# Altium PCB BancoPruebas.PcbDoc
Units mm, origin at the board's own origin, x right, y up, seen from the top; angles counter-clockwise.
Board outline 100 x 50 mm, 2 copper layers (Top Layer, Bottom Layer); 24 components, 12 nets, 44 pads, 0 vias.
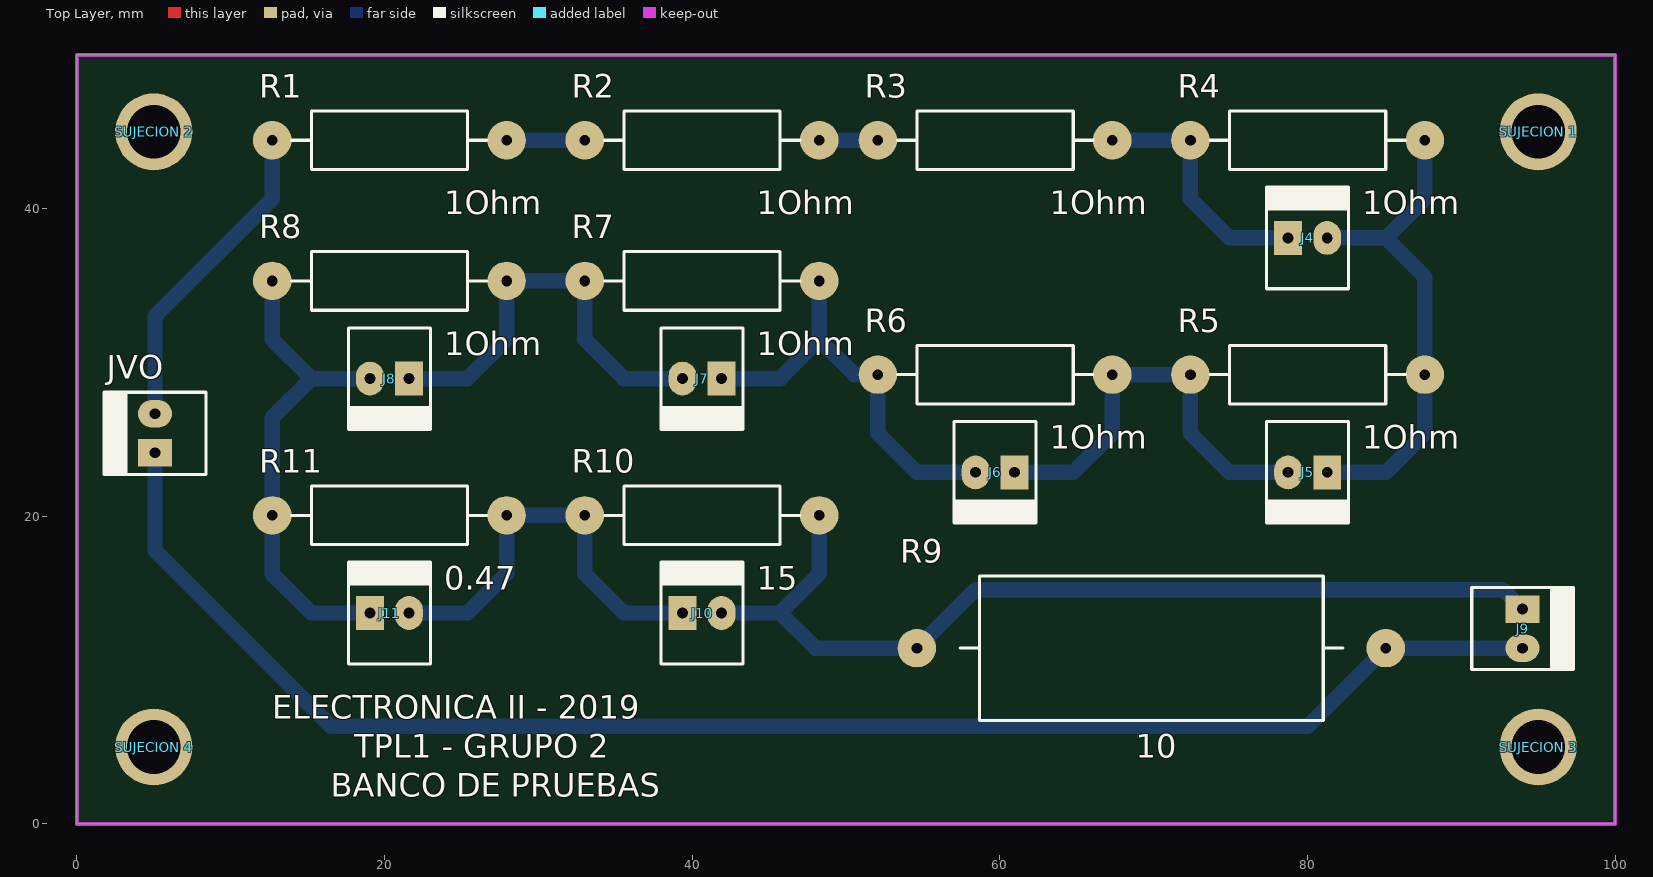
[diagram p0: Top Layer view]
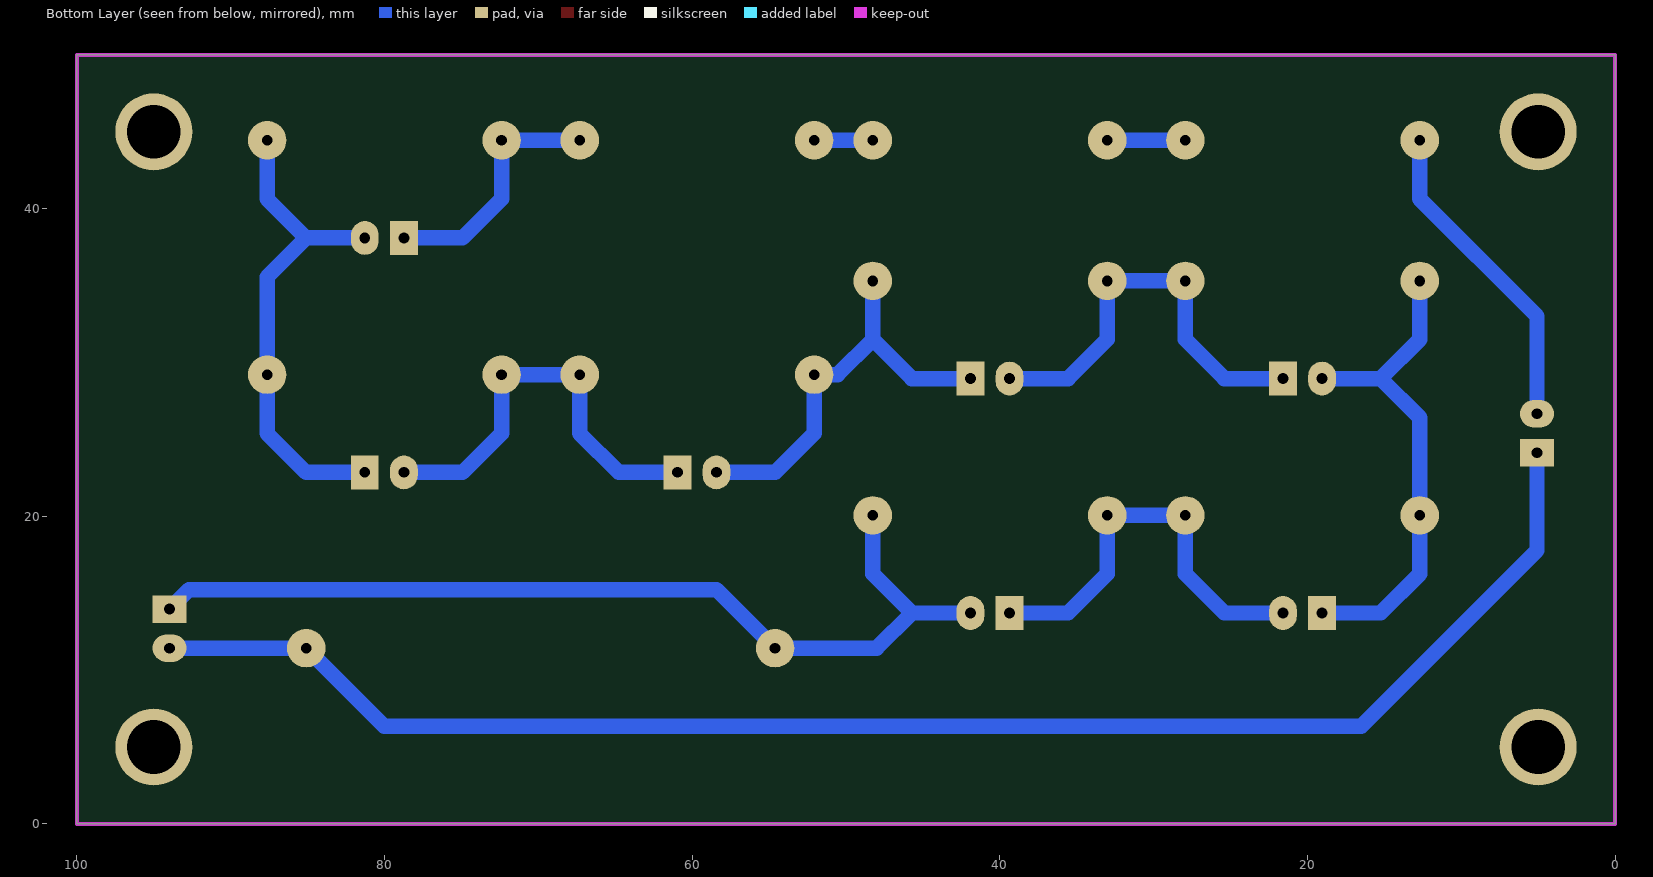
[diagram p1: Bottom Layer view, seen from below]
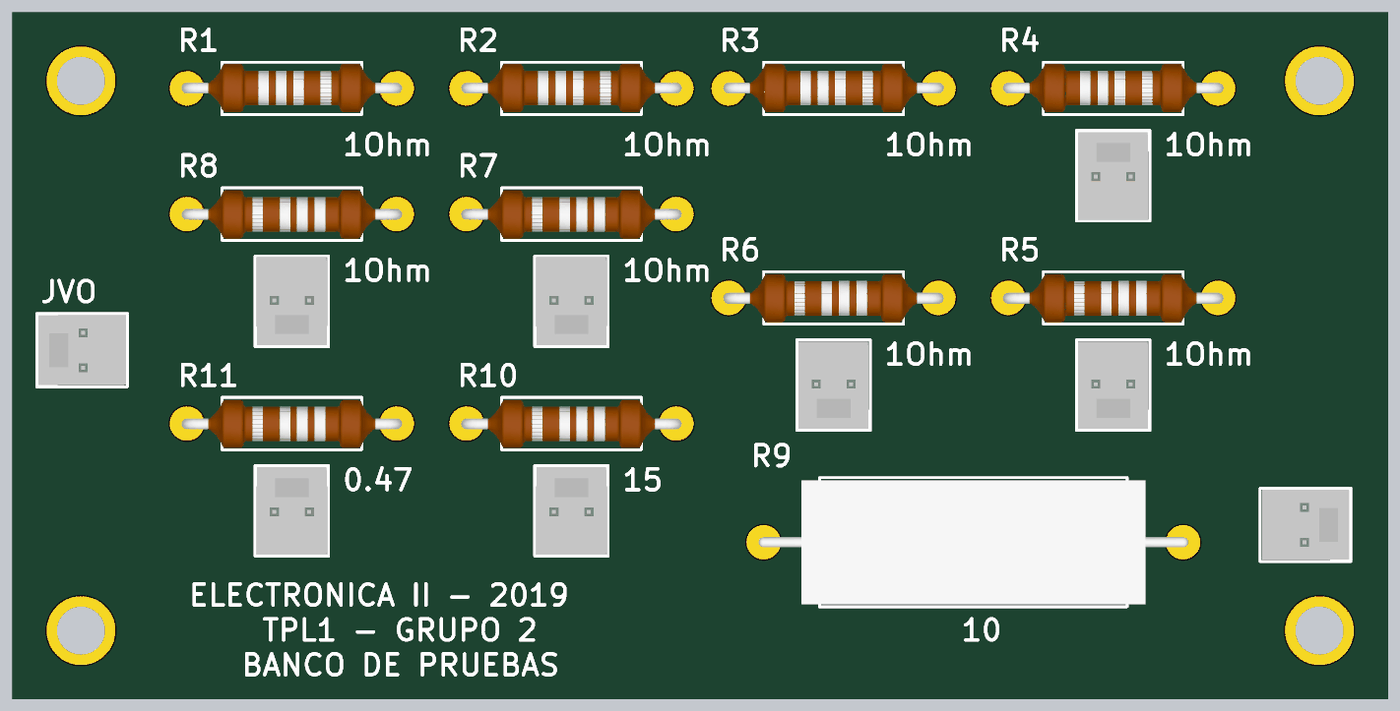
[diagram p2: 3D render of the assembled board from above, using the file's embedded part models]

## Layer stack, top to bottom
Top Solder: solder mask 0.0102, Solder Resist, Dk 3.5
Top Layer: signal copper 0.0356
Dielectric 1: dielectric 0.32, FR-4, Dk 4.8
Bottom Layer: signal copper 0.0356
Bottom Solder: solder mask 0.0102, Solder Resist, Dk 3.5

## Board outline
0,0 0,50 100,50 100,0

## Design rules (kind name [scope] priority, off if disabled: settings)
Clearance [All] p1: gap=0.7
PolygonConnect [All] p1: connectstyle=Relief reliefconductorwidth=0.254 reliefentries=4 polygonreliefangle="90 Angle" airgapwidth=0.254
RoutingVias [All] p1: holewidth=0.711 width=1.27 viastyle="Through Hole" minholewidth=0.711 minwidth=1.27 maxholewidth=0.711 maxwidth=1.27
SolderMaskExpansion [All] p1: expansion=0.102
Width [All] p1: maxlimit=1 minlimit=1 preferedwidth=1
30 further rules are at their usual default settings.

## Components (designator, comment, footprint, x,y, rotation, side; value= is the part's Value field where it differs from the comment)
J4 "CC" MOLEX2 78.74,38.1 r0 top
J5 "CC" MOLEX2 81.28,22.86 r180 top
J6 "CC" MOLEX2 60.96,22.86 r180 top
J7 "CC" MOLEX2 41.91,28.956 r180 top
J8 "CC" MOLEX2 21.59,28.956 r180 top
J9 "CC" MOLEX2 93.98,13.97 r270 top
J10 "CC" MOLEX2 39.37,13.716 r0 top
J11 "CC" MOLEX2 19.05,13.716 r0 top
JVO "VO" MOLEX2 5.08,24.13 r90 top
R1 "1" RES600 12.7,44.45 r0 top
R2 "1" RES600 33.02,44.45 r0 top
R3 "1" RES600 52.07,44.45 r0 top
R4 "1" RES600 72.39,44.45 r0 top
R5 "1" RES600 87.63,29.21 r180 top
R6 "1" RES600 67.31,29.21 r180 top
R7 "1" RES600 48.26,35.306 r180 top
R8 "1" RES600 27.94,35.306 r180 top
R9 "10" RES1200 69.85,11.43 r180 top
R10 "15" RES600 48.26,20.066 r180 top
R11 "0.47" RES600 27.94,20.066 r180 top
"SUJECION 1" "SUJECION" "SUJECION (5.00MM - 3.50MM)" 95,45 r90 top
"SUJECION 2" "SUJECION" "SUJECION (5.00MM - 3.50MM)" 5,45 r90 top
"SUJECION 3" "SUJECION" "SUJECION (5.00MM - 3.50MM)" 95,5 r90 top
"SUJECION 4" "SUJECION" "SUJECION (5.00MM - 3.50MM)" 5,5 r90 top

## Footprints (in the part's own frame and the unit in brackets; to place one, negate y for a bottom-side part, rotate by r counter-clockwise, add the part's x,y. Pads: shape width x height; smd on the part's side, far side on the other; paste and mask are expansions set on the pad)
MOLEX2 [mm]
  rect 1.8x2.2 hole 0.7: 1(0,0)
  oval 1.8x2.2 hole 0.7: 2(2.54,0)
  silkscreen extent -1.4,-3.3 3.94,3.3, body extent -1.27,-3.17 3.81,3.17, height 10.74
RES600 [mm]
  round 2.5 hole 0.7: 1(0,0) 2(15.24,0)
  silkscreen extent 1.27,-1.91 13.97,1.91, body extent -0.4,-1.72 15.64,1.78, height 3.59
RES1200 [mm]
  round 2.5 hole 0.7: 1(-15.24,0) 2(15.24,0)
  silkscreen extent -12.45,-4.7 12.45,4.7, body extent -15.62,-4.5 15.61,4.5, height 9.51
"SUJECION (5.00MM - 3.50MM)" [mm]
  round 5 hole 3.5: 1(0,0)

## Part data
J4 J5 J6 J7 J8 J9 J10 J11 JVO: library part MOLEX2
R1 R2 R3 R4 R5 R6 R7 R8 R9 R10 R11: library part RES

## Nets (pads, with @x,y where several pads share a name; then routed paths per layer and width w, separated by ;. In a path a pad name is that pad's centre, name@x,y a point inside that pad or via, vN(x,y) a via of type N, cw(c..) or ccw(c..) an arc to the next point about the centre after c; other vN are vias at no path point)
NetJ4_1: J4.1 R3.2 R4.1 | length 16.3
  Bottom Layer w1: R3.2 R4.1 72.39,40.64 74.93,38.1 J4.1
NetJ4_2: J4.2 J5.1 R4.2 R5.1 | length 32.4
  Bottom Layer w1: J5.1 85.09,22.86 87.63,25.4 R5.1 87.63,35.56 85.09,38.1 ; J4.2 85.09,38.1 ; R4.2 87.63,40.64 85.09,38.1
NetJ5_2: J5.2 J6.1 R5.2 R6.1 | length 27.5
  Bottom Layer w1: J6.1 64.77,22.86 67.31,25.4 R6.1 R5.2 72.39,25.4 74.93,22.86 J5.2
NetJ6_2: J6.2 J7.1 R6.2 R7.1 | length 27.2
  Bottom Layer w1: J7.1 45.72,28.956 48.26,31.496 ; R7.1 48.26,31.496 ; J6.2 54.61,22.86 52.07,25.4 R6.2 50.546,29.21 48.26,31.496
NetJ7_2: J7.2 J8.1 R7.2 R8.1 | length 27.5
  Bottom Layer w1: J8.1 25.4,28.956 27.94,31.496 R8.1 R7.2 33.02,31.496 35.56,28.956 J7.2
NetJ8_2: J8.2 J11.1 R8.2 R11.2 | length 32.4
  Bottom Layer w1: R8.2 12.7,31.496 15.24,28.956 ; J11.1 15.24,13.716 12.7,16.256 R11.2 12.7,26.416 15.24,28.956 ; J8.2 15.24,28.956
NetJ9_1: J9.1 J10.2 R9.2 R10.1 | length 62.5
  Bottom Layer w1: J10.2 45.72,13.716 ; R10.1 48.26,16.256 45.72,13.716 ; J9.1 92.71,15.24 58.42,15.24 R9.2 48.006,11.43 45.72,13.716
NetJ9_2: J9.2 JVO.1 R9.1 | length 102.1
  Bottom Layer w1: JVO.1 5.08,17.78 16.51,6.35 80.01,6.35 R9.1 J9.2
NetJ10_1: J10.1 J11.2 R10.2 R11.1 | length 27.5
  Bottom Layer w1: J11.2 25.4,13.716 27.94,16.256 R11.1 R10.2 33.02,16.256 35.56,13.716 J10.1
NetJVO_2: JVO.2 R1.1 | length 20.9
  Bottom Layer w1: JVO.2 5.08,33.02 12.7,40.64 R1.1
NetR1_2: R1.2 R2.1 | length 5.1
  Bottom Layer w1: R1.2 R2.1
NetR2_2: R2.2 R3.1 | length 3.8
  Bottom Layer w1: R2.2 R3.1
pads on no net: "SUJECION 1.1" "SUJECION 2.1" "SUJECION 3.1" "SUJECION 4.1"

## Keep-outs
Keep-Out Layer:
  the board outline again, w0.254

## Silkscreen, mask and mechanical layers (free items; w line width, h text height)
Top Overlay:
  text "1Ohm" at 23.876,39.624 h1.52
  text "1Ohm" at 44.196,39.624 h1.52
  text "1Ohm" at 63.246,39.624 h1.52
  text "1Ohm" at 83.566,39.624 h1.52
  text "1Ohm" at 23.876,30.48 h1.52
  text "1Ohm" at 44.196,30.48 h1.52
  text "1Ohm" at 63.246,24.384 h1.52
  text "1Ohm" at 83.566,24.384 h1.52
  text "0.47" at 23.876,15.24 h1.52
  text "15" at 44.196,15.24 h1.52
  text "ELECTRONICA II - 2019" at 12.7,6.858 h1.52
  text "TPL1 - GRUPO 2" at 18.034,4.318 h1.52
  text "10" at 68.834,4.318 h1.52
  text "BANCO DE PRUEBAS" at 16.51,1.778 h1.52